# Altium PCB SimpleNode2.PcbDoc
Units mm, origin at the board's own origin, x right, y up, seen from the top; angles counter-clockwise.
Board outline 152.4 x 101.6 mm, 2 copper layers (Top Layer, Bottom Layer); 19 components, 14 nets, 59 pads, 6 vias.
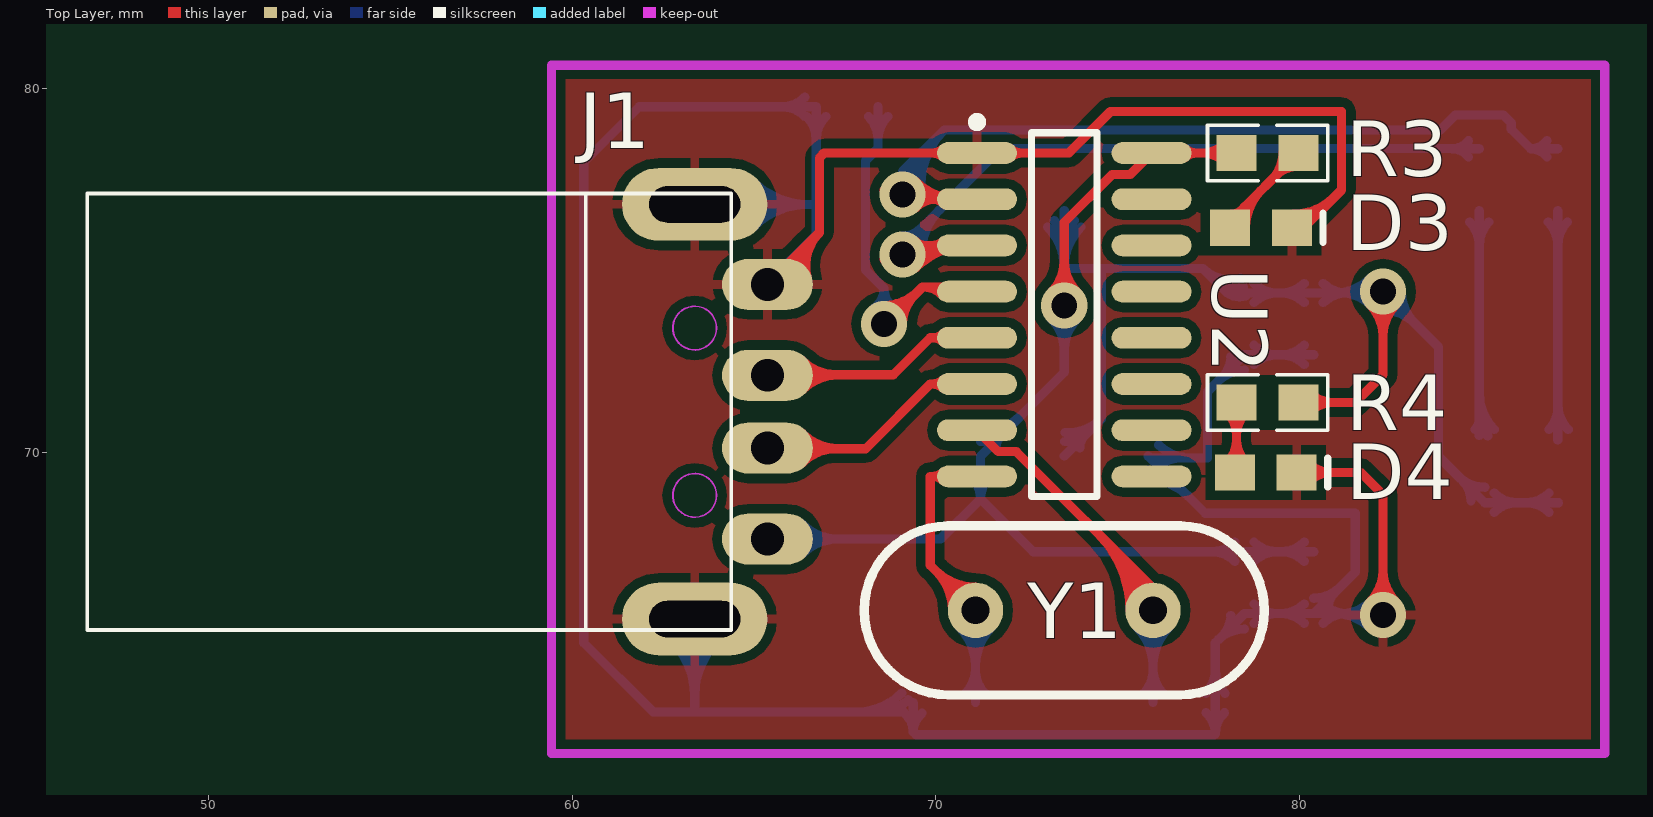
[diagram p0: Top Layer view]
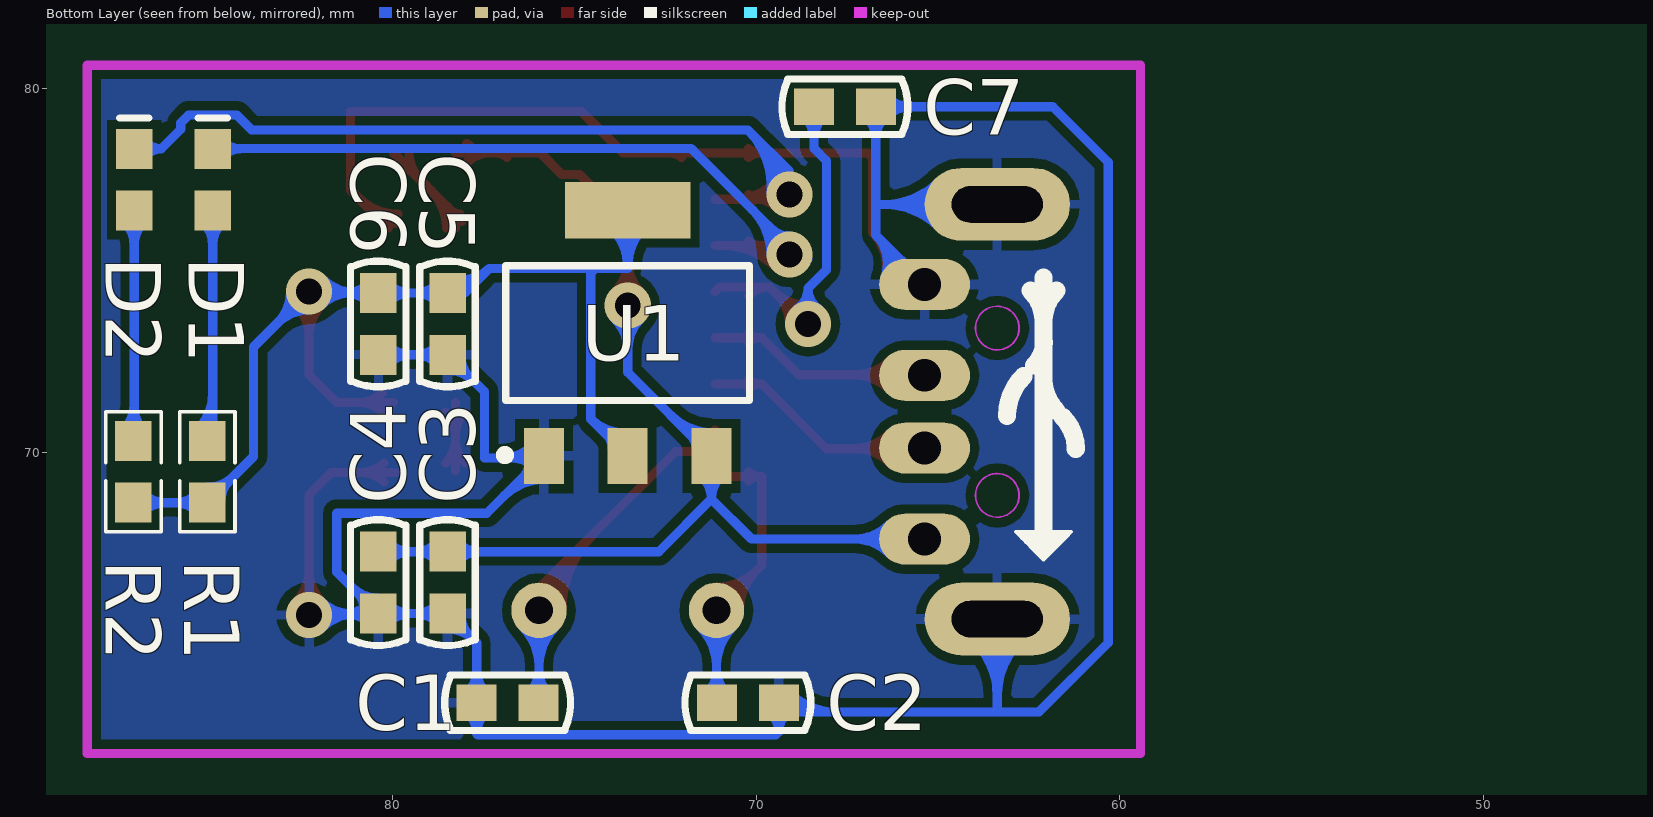
[diagram p1: Bottom Layer view, seen from below]

## Layer stack, top to bottom
Top Layer: signal copper 0.0356
Dielectric: dielectric 0.32, FR-4, Dk 4.8
Bottom Layer: signal copper 0.0356

## Board outline
25.4,25.4 177.8,25.4 177.8,127 25.4,127

## Design rules (kind name [scope] priority, off if disabled: settings)
Clearance [All] p1: gap=0.254
DiffPairsRouting DiffPair_DiffPairsRouting [InDifferentialPair ('RS232 Line Pair')] p1: maxlimit=0.254 minlimit=0.254 mostfreqgap=0.254 maxuncoupledlength=12.7
DiffPairsRouting DiffPair_DiffPairsRouting_1 [InDifferentialPair ('XTAL Line Pair')] p2: maxlimit=0.254 minlimit=0.254 mostfreqgap=0.254 maxuncoupledlength=12.7
DiffPairsRouting DiffPair_DiffPairsRouting_2 [All] p3: maxlimit=0.254 minlimit=0.254 mostfreqgap=0.254 maxuncoupledlength=12.7
DiffPairsRouting DiffPair_DiffPairsRouting_3 [InDifferentialPair ('XTAL Data Line Pair')] p4: maxlimit=0.254 minlimit=0.254 mostfreqgap=0.254 maxuncoupledlength=12.7
DiffPairsRouting DiffPair_DiffPairsRouting_4 [InDifferentialPair ('RS232 Data Line Pair')] p5: maxlimit=0.254 minlimit=0.254 mostfreqgap=0.254 maxuncoupledlength=12.7
DiffPairsRouting DiffPair_DiffPairsRouting_5 [InDifferentialPair ('USB Data Line Pair')] p6: maxlimit=0.254 minlimit=0.254 mostfreqgap=0.254 maxuncoupledlength=12.7
DiffPairsRouting DiffPair_DiffPairsRouting_6 [InDifferentialPair ('USB Data Line Pair')] p7: maxlimit=0.254 minlimit=0.254 mostfreqgap=0.254 maxuncoupledlength=12.7
DiffPairsRouting [All] p8: maxlimit=0.254 minlimit=0.254 mostfreqgap=0.254 maxuncoupledlength=12.7
MatchedLengths DiffPair_MatchedLengths [InDifferentialPair ('RS232 Line Pair')] p1: tolerance=25.4 checknetsindiffpair=TRUE checkdiffpairvsdiffpair=TRUE checkothers=TRUE
MatchedLengths DiffPair_MatchedLengths_1 [InDifferentialPair ('XTAL Line Pair')] p2: tolerance=25.4 checknetsindiffpair=TRUE checkdiffpairvsdiffpair=TRUE checkothers=TRUE
MatchedLengths DiffPair_MatchedLengths_2 [All] p3: tolerance=25.4 checknetsindiffpair=TRUE checkdiffpairvsdiffpair=TRUE checkothers=TRUE
MatchedLengths DiffPair_MatchedLengths_3 [InDifferentialPair ('XTAL Data Line Pair')] p4: tolerance=25.4 checknetsindiffpair=TRUE checkdiffpairvsdiffpair=TRUE checkothers=TRUE
MatchedLengths DiffPair_MatchedLengths_4 [InDifferentialPair ('RS232 Data Line Pair')] p5: tolerance=25.4 checknetsindiffpair=TRUE checkdiffpairvsdiffpair=TRUE checkothers=TRUE
MatchedLengths DiffPair_MatchedLengths_5 [InDifferentialPair ('USB Data Line Pair')] p6: tolerance=25.4 checknetsindiffpair=TRUE checkdiffpairvsdiffpair=TRUE checkothers=TRUE
MatchedLengths DiffPair_MatchedLengths_6 [InDifferentialPair ('USB Data Line Pair')] p7: tolerance=25.4 checknetsindiffpair=TRUE checkdiffpairvsdiffpair=TRUE checkothers=TRUE
PolygonConnect [All] p1: connectstyle=Relief reliefconductorwidth=0.254 reliefentries=4 polygonreliefangle="90 Angle"
RoutingVias [All] p1: holewidth=0.711 width=1.27 viastyle="Through Hole" minholewidth=0.711 minwidth=1.27 maxholewidth=0.711 maxwidth=1.27
SilkscreenOverComponentPads [All] p1 off: minsilkscreentomaskgap=0
SolderMaskExpansion [All] p1: expansion=0.102
Width DiffPair_Width [InDifferentialPair('RS232 Line Pair')] p1: maxlimit=0.254 minlimit=0.254 preferedwidth=0.254
Width DiffPair_Width_1 [InDifferentialPair('XTAL Line Pair')] p2: maxlimit=0.254 minlimit=0.254 preferedwidth=0.254
Width DiffPair_Width_2 [All] p3: maxlimit=0.254 minlimit=0.254 preferedwidth=0.254
Width DiffPair_Width_3 [InDifferentialPair('XTAL Data Line Pair')] p4: maxlimit=0.254 minlimit=0.254 preferedwidth=0.254
Width DiffPair_Width_4 [InDifferentialPair('RS232 Data Line Pair')] p5: maxlimit=0.254 minlimit=0.254 preferedwidth=0.254
Width DiffPair_Width_5 [InDifferentialPair('USB Data Line Pair')] p6: maxlimit=0.254 minlimit=0.254 preferedwidth=0.254
Width DiffPair_Width_6 [InDifferentialPair('USB Data Line Pair')] p7: maxlimit=0.254 minlimit=0.254 preferedwidth=0.254
Width [All] p8: maxlimit=0.254 minlimit=0.254 preferedwidth=0.254
26 further rules are at their usual default settings.

## Classes and differential pairs
differential pair "RS232 Line Pair": +TXD -RXD
differential pair "XTAL Line Pair": +XO -XI
differential pair "USB Data Line Pair": +UD+ -UD-

## Components (designator, comment, footprint, x,y, rotation, side; value= is the part's Value field where it differs from the comment)
C1 "CAP" C0603 76.835,63.119 r180 bottom
C2 "CAP" C0603 70.231,63.119 r0 bottom
C3 "104" C0603 78.486,66.421 r90 bottom
C4 "106" C0603 80.391,66.421 r90 bottom
C5 "104" C0603 78.486,73.533 r90 bottom
C6 "106" C0603 80.391,73.533 r90 bottom
C7 "104" C0603 67.564,79.502 r0 bottom
D1 "RXD" LED0603 84.963,77.672 r90 bottom
D2 "TXD" LED0603 87.122,77.672 r90 bottom
D3 "PWR5V" LED0603 79.121,76.2 r0 top
D4 "PWR3V3" LED0603 79.248,69.469 r0 top
J1 "USB-A" "USB-A 公头" 63.373,71.12 r0 top
R1 "470" R0603 85.09,69.469 r270 bottom
R2 "470" R0603 87.122,69.469 r270 bottom
R3 "470" R0603 79.121,78.232 r180 top
R4 "470" R0603 79.121,71.374 r0 top
U1 "ASM1117-3-3" SOT-223 73.533,73.279 r180 bottom
U2 "CH340G" SOP16 73.533,73.787 r0 top
Y1 "12M" HC-49S 73.533,65.659 r180 top

## Footprints (in the part's own frame and the unit in brackets; to place one, negate y for a bottom-side part, rotate by r counter-clockwise, add the part's x,y. Pads: shape width x height; smd on the part's side, far side on the other; paste and mask are expansions set on the pad)
C0603 [mm]
  rect 1.1x1 smd: 1(-0.85,0) 2(0.85,0)
  silkscreen extent -1.73,-0.76 1.73,0.76, body extent -1.14,-0.38 1.14,0.38, height 1
HC-49S [mil]
  round 60 hole 30: 1(-96.06,0) 2(96.06,0)
  silkscreen extent -217,-92 217,92
LED0603 [mm]
  rect 1.1x1 smd: 1(-1.025,-0.021) 2(0.675,-0.021)
  silkscreen extent 1.52,-0.42 1.52,0.38
R0603 [mm]
  rect 1.1x1 smd: 1(-0.85,0) 2(0.85,0)
  silkscreen extent -1.65,-0.76 1.65,0.76, body extent -1.14,-0.38 1.14,0.38, height 1
SOP16 [mm]
  oval 2.2x0.6 smd: 1(-2.4,4.445) 2(-2.4,3.175) 3(-2.4,1.905) 4(-2.4,0.635) 5(-2.4,-0.635) 6(-2.4,-1.905) 7(-2.4,-3.175) 8(-2.4,-4.445) 9(2.4,-4.445) 10(2.4,-3.175) 11(2.4,-1.905) 12(2.4,-0.635) 13(2.4,0.635) 14(2.4,1.905) 15(2.4,3.175) 16(2.4,4.445)
  silkscreen extent -2.52,-5 0.9,5.42, body extent -1.95,-4.95 1.95,4.95, height 1.5
SOT-223 [mm]
  rect 1.1x1.55 smd: 1(-2.3,-3.375) 2(0,-3.375) 3(2.3,-3.375)
  rect 3.45x1.55 smd: 4(0,3.375)
  silkscreen extent -3.5,-3.48 3.35,1.85, body extent -3.3,-3.94 3.3,3.43, height 0.8
"USB-A 公头" [mm]
  oval 1.5x1.4 on Bottom Overlay: 1(-1.27,3.683)
  oval 2.5x1.4 hole 0.9: 1(2,-3.5) 2(2,-1) 3(2,1) 4(2,3.5)
  oval 4x2 hole 1 slot 2.5 at 0 deg: 4(0,-5.7) 4(0,5.7)
  Keep-Out Layer circle w0.05: c0,-2.3 r0.6
  Keep-Out Layer circle w0.05: c0,2.3 r0.6
  silkscreen extent -16.7,-6 1,6

## Part data
D1 D2 D3 D4: library part 贴片发光二级管
J1: library part "USB-A 公头", "USB-A 公头"
Y1: library part 直插无源晶振

## Via types
v1: diameter 1.27, hole 0.711, Top Layer to Bottom Layer, 6 vias

## Nets (pads, with @x,y where several pads share a name; then routed paths per layer and width w, separated by ;. In a path a pad name is that pad's centre, name@x,y a point inside that pad or via, vN(x,y) a via of type N, cw(c..) or ccw(c..) an arc to the next point about the centre after c; other vN are vias at no path point)
GND: C1.1 C2.1 C3.1 C4.1 C5.1 C6.1 C7.1 D3.2 D4.2 J1.4 U1.1 U2.1 | length 153.8
  Top Layer w0.254: J1.4@65.373,74.62 66.802,76.049 ; J1.4@65.985,74.638 cw(c66.769,74.863) 66.193,75.44 ; J1.4@66.23,74.708 cw(c67.242,74.999) 66.497,75.744 ; J1.4@66.474,74.778 cw(c67.716,75.135) 66.802,76.049 ; U2.1@70.211,78.11 ccw(c69.915,77.814) 69.915,78.232 ccw(c69.915,78.65) U2.1@70.211,78.354 ; U2.1@72.055,78.11 cw(c72.351,77.814) 72.351,78.232 cw(c72.351,78.65) U2.1@72.055,78.354 ; D3.2@79.846,76.298 ccw(c79.846,77.238) 80.51,76.573 ; D3.2@79.846,76.552 ccw(c79.846,78.105) 80.944,77.007 ; D4.2 81.682,69.448 82.296,68.834 v1(82.296,65.532) ; D3.2@80.116,76.179 81.153,77.216 81.153,79.375 74.803,79.375 73.66,78.232 U2.1 66.929,78.232 66.802,78.105 66.802,76.049 ; D4.2@80.237,69.184 cw(c80.873,68.548) 80.873,69.448 cw(c80.873,70.349) D4.2@80.237,69.712 ; v1@81.937,65.891 ccw(c81.07,66.758) 82.296,66.758 ccw(c83.522,66.758) v1@82.655,65.891
  Bottom Layer w0.254: J1.4@62.756,64.803 cw(c61.265,63.312) 63.373,63.312 cw(c65.481,63.312) J1.4@63.99,64.803 ; J1.4@62.935,64.982 cw(c61.879,63.926) 63.373,63.926 cw(c64.867,63.926) J1.4@63.811,64.982 ; J1.4@63.373,65.42 63.373,62.865 ; J1.4@63.373,76.82 66.699,76.82 ; J1.4@64.811,76.382 cw(c65.867,75.326) 65.867,76.82 cw(c65.867,78.314) J1.4@64.811,77.258 ; J1.4@64.99,76.203 cw(c66.481,74.712) 66.481,76.82 cw(c66.481,78.928) J1.4@64.99,77.437 ; J1.4@65.361,74.632 66.714,75.985 ; J1.4@65.984,74.643 cw(c66.679,74.901) 66.155,75.426 ; J1.4@66.222,74.731 cw(c67.087,75.053) 66.434,75.705 ; C7.1@66.4,79.238 ccw(c65.764,78.602) 65.764,79.502 ccw(c65.764,80.402) C7.1@66.4,79.766 ; C7.1@66.45,79.238 cw(c65.814,78.602) 66.714,78.602 cw(c67.615,78.602) C7.1@66.978,79.238 ; J1.4@66.46,74.82 cw(c67.494,75.205) 66.714,75.985 ; 67.817,62.865 ccw(c67.817,64.633) C2.1@69.067,63.383 ; 68.431,62.865 ccw(c68.431,64.019) C2.1@69.247,63.203 ; C2.1@69.127,62.865 63.373,62.865 ; C2.1@69.141,62.834 cw(c68.708,62.318) 69.381,62.318 ; C2.1 69.381,62.318 ; C2.1@69.621,62.834 ccw(c70.055,62.318) 69.381,62.318 ; U1.1@75.833,69.256 cw(c75.833,67.692) 76.939,68.798 ; U1.1@75.833,69.51 cw(c75.833,68.559) 76.506,69.231 ; U1.1 U1.1@75.887,69.85 ; U1.1@76.132,69.605 cw(c76.724,69.013) 76.724,69.85 ; U1.1@76.132,70.203 ccw(c76.985,71.056) 76.985,69.85 ; U1.1@76.256,69.679 ccw(c76.734,69.679) 76.396,69.341 ; C1.1@77.421,63.383 ccw(c76.784,64.019) 77.685,64.019 ccw(c78.585,64.019) C1.1@77.949,63.383 ; C1.1@77.432,62.844 cw(c76.903,62.269) 77.685,62.269 ; 77.764,64.849 cw(c78.486,64.127) C3.1@78.486,65.148 ; 77.764,71.961 cw(c78.486,71.239) C5.1@78.486,72.26 ; 77.885,64.97 ccw(c77.333,65.521) C3.1@78.113,65.521 ; 77.885,72.082 ccw(c77.333,72.633) C5.1@78.113,72.633 ; C1.1@77.938,62.844 ccw(c78.467,62.269) 77.685,62.269 ; C3.1@78.75,65.307 cw(c79.386,64.671) 79.386,65.571 cw(c79.386,66.472) C3.1@78.75,65.835 ; C5.1@78.75,72.419 cw(c79.387,71.782) 79.387,72.683 cw(c79.386,73.583) C5.1@78.75,72.947 ; C4.1@80.127,65.307 ccw(c79.491,64.671) 79.491,65.571 ccw(c79.491,66.472) C4.1@80.127,65.835 ; C6.1@80.127,72.419 ccw(c79.491,71.783) 79.491,72.683 ccw(c79.491,73.584) C6.1@80.127,72.947 ; C4.1@80.391,65.994 ccw(c80.391,67.015) 81.113,66.293 ; C6.1 C5.1 77.47,71.667 77.47,69.85 U1.1@75.887,69.85 ; C4.1@80.655,65.307 cw(c81.291,64.671) 81.291,65.571 cw(c81.291,66.472) C4.1@80.655,65.835 ; C4.1@80.764,65.621 cw(c81.544,65.621) 80.992,66.172 ; 80.975,65.571 cw(c80.975,64.211) v1@81.937,65.173 ; 81.164,65.571 ccw(c81.164,66.664) v1@81.937,65.891 ; 81.589,65.571 cw(c81.589,64.825) v1@82.116,65.352 ; v1@82.257,65.571 C4.1 ; 63.373,62.865 62.23,62.865 60.325,64.77 60.325,77.978 61.849,79.502 C7.1 66.714,75.985 ; 69.381,62.318 69.461,62.238 77.654,62.238 77.685,62.269 ; U1.1@75.887,69.85 77.411,68.326 81.534,68.326 81.534,66.714 C4.1 ; 77.685,62.269 C1.1 77.685,64.77 C3.1 C4.1
NetC7_2: C7.2 U2.4 | length 15.2
  Top Layer w0.254: v1(68.58,73.533) 68.62,73.533 69.636,74.549 ; v1@68.58,73.787 ccw(c68.58,74.496) 69.082,73.995 ; v1@68.58,74.041 ccw(c68.58,75.364) 69.515,74.428 ; v1@69.088,73.533 cw(c70.218,73.533) 69.419,74.332 ; U2.4@70.207,74.303 ccw(c69.636,73.762) 69.636,74.549 ; U2.4 71.006,74.549 69.636,74.549
  Bottom Layer w0.254: C7.2@68.15,79.238 cw(c67.513,78.602) 68.414,78.602 cw(c69.314,78.602) C7.2@68.678,79.238 ; v1@68.289,73.949 ccw(c67.896,74.509) 68.58,74.509 ; C7.2 68.414,78.36 68.072,78.018 68.072,75.017 68.58,74.509 ; v1(68.58,73.533) 68.58,74.509 ; v1@68.871,73.949 cw(c69.264,74.509) 68.58,74.509
NetD1_1: D1.1 R1.1 | length 9.6
  Bottom Layer w0.254: D1.1@84.678,76.333 cw(c84.042,75.697) 84.942,75.697 cw(c85.843,75.697) D1.1@85.206,76.333 ; R1.1@84.826,70.633 ccw(c84.547,70.912) 84.942,70.912 ; R1.1@84.942,70.467 D1.1 ; 84.942,71.013 ccw(c85.734,71.013) R1.1@85.174,70.453 ; 84.942,71.626 ccw(c86.348,71.626) R1.1@85.354,70.633
NetD2_1: D2.1 R2.1 | length 9.1
  Bottom Layer w0.254: D2.1@86.837,76.333 cw(c86.201,75.697) 87.101,75.697 cw(c88.002,75.697) D2.1@87.365,76.333 ; R2.1@86.858,70.633 ccw(c86.272,71.219) 87.101,71.219 ; R2.1@87.101,70.34 D2.1 ; 87.101,71.32 ccw(c88.073,71.32) R2.1@87.386,70.633
NetD3_1: D3.1 R3.1 | length 6.1
  Top Layer w0.254: D3.1@78.096,76.357 R3.1 ; D3.1@78.146,76.552 ccw(c78.146,76.903) D3.1@78.394,76.655 ; D3.1@78.265,76.179 cw(c79.102,76.179) 78.51,76.771 ; D3.1@78.519,76.179 cw(c79.969,76.179) 78.944,77.205 ; 79.249,77.51 ccw(c78.527,78.232) R3.1@79.548,78.232 ; 79.37,77.631 cw(c79.921,77.079) R3.1@79.921,77.859
NetD4_1: D4.1 R4.1 | length 4.7
  Top Layer w0.254: R4.1@78.007,71.11 cw(c77.371,70.474) 78.271,70.474 cw(c79.172,70.474) R4.1@78.535,71.11 ; D4.1@78.009,69.712 ccw(c77.377,70.344) 78.271,70.344 ; D4.1@78.271,69.496 R4.1 ; 78.271,70.353 ccw(c79.178,70.353) D4.1@78.537,69.712
RXD: D1.2 U2.3 | length 29
  Top Layer w0.254: v1@68.58,75.311 v1@68.834,75.311 ; v1@69.268,75.258 cw(c70.314,74.212) U2.3@70.314,75.692 ; v1@69.447,75.079 cw(c70.928,73.598) U2.3@70.928,75.692 ; v1@69.447,75.797 ccw(c69.701,76.051) 69.701,75.692 ccw(c69.701,74.825) v1(69.088,75.438) v1@68.834,75.311 ; U2.3@70.211,75.57 ccw(c69.915,75.274) 69.915,75.692 ccw(c69.915,76.11) U2.3@70.211,75.814 ; U2.3 68.961,75.692 68.897,75.501 v1@68.834,75.311
  Bottom Layer w0.254: v1@68.58,75.311 68.834,75.311 v1(69.088,75.438) ; v1@68.981,75.545 71.795,78.359 84.189,78.359 84.201,78.347 ; v1@69.088,75.946 ccw(c69.088,76.655) 69.59,76.154 ; v1@69.342,75.438 cw(c70.472,75.438) 69.673,76.237 ; v1@69.596,75.438 cw(c71.339,75.438) 70.107,76.671 ; D1.2@84.643,78.125 ccw(c84.201,77.797) 84.201,78.347 ; D1.2@84.643,78.569 cw(c84.201,78.897) 84.201,78.347 ; D1.2 84.201,78.347
TXD: D2.2 U2.2 | length 32.3
  Top Layer w0.254: v1@68.58,77.216 v1@68.707,77.089 ; v1(69.088,77.089) v1@68.707,77.089 ; v1@69.268,77.269 ccw(c70.008,78.009) 70.008,76.962 ccw(c70.008,76.169) v1@69.447,76.73 ; v1@69.447,77.448 ccw(c70.621,78.622) U2.2@70.621,76.962 ; U2.2@70.211,76.84 ccw(c69.915,76.544) 69.915,76.962 ccw(c69.915,77.38) U2.2@70.211,77.084 ; U2.2 68.834,76.962 v1@68.707,77.089
  Bottom Layer w0.254: v1@69.341,77.11 cw(c71.07,77.253) 69.843,78.479 ; 69.456,78.092 ccw(c70.354,77.194) v1(69.088,77.089) 68.707,77.089 69.088,77.47 69.088,77.724 70.231,78.867 ; v1@69.594,77.131 cw(c71.786,77.312) 70.231,78.867 ; D2.2@86.802,78.125 ccw(c86.36,77.797) 86.36,78.347 ; D2.2@86.802,78.569 cw(c86.36,78.897) 86.36,78.347 ; D2.2 86.36,78.347 ; 70.231,78.867 83.873,78.867 84.284,79.278 85.6,79.278 85.823,79.055 85.823,78.884 86.36,78.347
UD+: J1.3 U2.5 | length 10.2
  Top Layer w0.254: J1.3@65.373,72.136 68.834,72.136 69.85,73.152 U2.5 ; J1.3@66.149,71.894 cw(c66.732,71.311) 66.732,72.136 ; J1.3@66.149,72.346 ccw(c66.655,72.852) 66.655,72.136 ; J1.3@66.328,71.715 cw(c67.345,70.698) 67.345,72.136 ; J1.3@66.328,72.525 ccw(c67.268,73.465) 67.268,72.136 ; U2.5@70.211,73.03 ccw(c69.915,72.734) 69.915,73.152 ccw(c69.915,73.57) U2.5@70.211,73.274
UD-: J1.2 U2.6 | length 10.5
  Top Layer w0.254: J1.2@65.373,70.104 68.072,70.104 69.85,71.882 U2.6 ; J1.2@66.149,69.894 cw(c66.655,69.388) 66.655,70.104 ; J1.2@66.149,70.346 ccw(c66.732,70.929) 66.732,70.104 ; J1.2@66.328,69.715 cw(c67.268,68.775) 67.268,70.104 ; J1.2@66.328,70.525 ccw(c67.345,71.542) 67.345,70.104 ; U2.6@70.211,71.76 ccw(c69.915,71.464) 69.915,71.882 ccw(c69.915,72.3) U2.6@70.211,72.004
VCC3V3: C5.2 C6.2 R1.2 R2.2 R4.2 U1.2 U1.4 | length 54.6
  Top Layer w0.254: R4.2 81.534,71.374 82.296,72.136 v1(82.296,74.422) ; R4.2@80.285,71.11 cw(c80.921,70.474) 80.921,71.374 cw(c80.921,72.274) R4.2@80.285,71.638 ; v1@81.937,74.063 cw(c81.07,73.196) 82.296,73.196 cw(c83.522,73.196) v1@82.655,74.063
  Bottom Layer w0.254: U1.4@73.075,76.196 cw(c71.969,75.09) 73.533,75.09 cw(c75.097,75.09) U1.4@73.991,76.196 ; U1.4@73.254,76.375 cw(c72.582,75.703) 73.533,75.703 cw(c74.484,75.703) U1.4@73.812,76.375 ; U1.2 74.549,70.92 74.549,74.93 74.422,75.057 ; U1.4 73.533,75.057 74.422,75.057 ; U1.2@73.545,70.298 ccw(c73.599,71.081) 74.155,70.526 ; U1.2@73.562,70.551 ccw(c73.651,71.818) 74.549,70.92 ; U1.2@73.956,70.129 cw(c74.434,70.129) 74.096,70.467 ; 77.646,74.754 ccw(c78.224,75.331) C5.2@78.453,74.547 ; 77.95,74.45 ccw(c78.361,74.862) C5.2@78.524,74.303 ; C5.2@78.017,74.383 77.343,75.057 ; C5.2@78.381,74.791 cw(c78.087,75.801) 77.343,75.057 ; C5.2 C6.2 v1@82.257,74.383 ; C5.2@78.75,74.119 cw(c79.387,73.482) 79.387,74.383 cw(c79.386,75.283) C5.2@78.75,74.647 ; C6.2@80.127,74.119 ccw(c79.491,73.482) 79.491,74.383 ccw(c79.491,75.283) C6.2@80.127,74.647 ; C6.2@80.655,74.119 cw(c81.291,73.482) 81.291,74.383 cw(c81.291,75.283) C6.2@80.655,74.647 ; 80.975,74.383 ccw(c80.975,75.743) v1@81.937,74.781 ; 81.164,74.383 cw(c81.164,73.29) v1@81.937,74.063 ; 81.589,74.383 ccw(c81.589,75.129) v1@82.116,74.602 ; v1@82.296,73.914 cw(c82.296,72.688) 83.163,73.555 cw(c84.03,74.422) v1@82.804,74.422 ; v1(82.296,74.422) 83.82,72.898 83.82,69.889 R1.2 R2.2 ; 84.368,69.341 ccw(c85.09,70.063) R1.2@85.09,69.042 ; 84.489,69.22 cw(c83.937,68.669) R1.2@84.717,68.669 ; R1.2@85.354,68.355 cw(c85.99,67.719) 85.99,68.619 cw(c85.99,69.52) R1.2@85.354,68.883 ; R2.2@86.858,68.355 ccw(c86.222,67.719) 86.222,68.619 ccw(c86.222,69.52) R2.2@86.858,68.883 ; 74.422,75.057 77.343,75.057
VCC5V: C3.2 C4.2 J1.1@65.373,67.62 R3.2 U1.3 U2.16 | length 47.5
  Top Layer w0.254: v1@73.174,74.4 ccw(c72.307,75.267) 73.533,75.267 ccw(c74.759,75.267) v1@73.892,74.4 ; v1(73.533,74.041) 73.533,76.325 74.851,77.643 75.344,77.643 U2.16 R3.2 ; U2.16@76.855,78.11 cw(c77.151,77.814) 77.151,78.232 cw(c77.151,78.65) U2.16@76.855,78.354 ; R3.2@77.957,77.968 ccw(c77.321,77.332) 77.321,78.232 ccw(c77.321,79.132) R3.2@77.957,78.496
  Bottom Layer w0.254: J1.1@65.373,67.62 70.132,67.62 71.233,68.721 ; J1.1@66.149,67.394 cw(c66.693,66.85) 66.693,67.62 cw(c66.693,68.39) J1.1@66.149,67.846 ; J1.1@66.328,67.215 cw(c67.306,66.237) 67.306,67.62 cw(c67.306,69.003) J1.1@66.328,68.025 ; U1.3@70.948,69.366 cw(c70.36,68.721) 71.233,68.721 ; U1.3@71.233,70.298 ccw(c71.233,71.249) 71.906,70.577 ; U1.3@71.233,70.552 ccw(c71.233,72.116) 72.339,71.01 ; U1.3@71.518,69.366 ccw(c72.106,68.721) 71.233,68.721 ; U1.3@71.656,70.129 cw(c72.134,70.129) 71.796,70.467 ; v1@73.174,73.682 cw(c72.307,72.815) 73.533,72.815 cw(c74.759,72.815) v1@73.892,73.682 ; v1(73.533,74.041) 73.533,72.204 U1.3 71.233,68.721 ; C3.2@78.222,67.007 ccw(c77.586,66.37) 77.586,67.271 ccw(c77.586,68.171) C3.2@78.222,67.535 ; C3.2@78.75,67.007 cw(c79.386,66.37) 79.386,67.271 cw(c79.386,68.171) C3.2@78.75,67.535 ; C4.2@80.127,67.007 ccw(c79.491,66.37) 79.491,67.271 ccw(c79.491,68.171) C4.2@80.127,67.535 ; C4.2 C3.2 72.683,67.271 71.233,68.721
XI: C1.2 U2.7 Y1.1 | length 21.6
  Top Layer w0.254: U2.7 71.722,70.023 72.215,70.023 75.973,66.265 Y1.1 ; 74.46,67.778 cw(c72.342,65.659) Y1.1@75.338,65.659 ; 74.894,67.344 cw(c73.209,65.659) Y1.1@75.592,65.659 ; 75.328,66.91 cw(c74.076,65.659) Y1.1@75.846,65.659 ; 75.761,66.477 cw(c74.943,65.659) Y1.1@76.1,65.659
  Bottom Layer w0.254: Y1.1@75.524,65.21 cw(c74.44,64.126) 75.973,64.126 cw(c77.506,64.126) Y1.1@76.422,65.21 ; Y1.1@75.704,65.39 cw(c75.053,64.739) 75.973,64.739 cw(c76.893,64.739) Y1.1@76.242,65.39 ; C1.2@75.721,63.383 ccw(c75.113,63.991) 75.973,63.991 ; C1.2@75.973,63.131 Y1.1 ; 75.973,64.048 ccw(c76.914,64.048) C1.2@76.249,63.383
XO: C2.2 U2.8 Y1.2 | length 17.8
  Top Layer w0.254: U2.8@70.211,69.22 ccw(c69.915,68.924) 69.915,69.342 ccw(c69.915,69.76) U2.8@70.211,69.464 ; Y1.2@70.458,65.659 ccw(c68.925,65.659) 70.009,66.743 ccw(c71.093,67.827) Y1.2@71.093,66.294 ; Y1.2@70.712,65.659 ccw(c69.792,65.659) 70.443,66.309 ccw(c71.093,66.96) Y1.2@71.093,66.04 ; Y1.2 69.85,66.902 69.85,69.342 U2.8
  Bottom Layer w0.254: Y1.2@70.644,65.21 cw(c69.56,64.126) 71.093,64.126 cw(c72.626,64.126) Y1.2@71.542,65.21 ; C2.2@70.817,63.383 ccw(c70.151,64.049) 71.093,64.049 ; Y1.2@70.824,65.39 cw(c70.173,64.739) 71.093,64.739 cw(c72.013,64.739) Y1.2@71.362,65.39 ; C2.2@71.093,63.131 Y1.2 ; 71.093,63.99 ccw(c71.952,63.99) C2.2@71.345,63.383
pads on no net: J1.1@62.103,74.803 U2.9 U2.10 U2.11 U2.12 U2.13 U2.14 U2.15

## Polygon pours and split planes (outlines as drawn)
GND on Top Layer "Top Layer-No Net" (solid, remove dead copper, pour order 2): 88.392,80.645 59.436,80.645 59.436,61.722 88.392,61.722
GND on Bottom Layer "Bottom Layer-No Net" (solid, remove dead copper, pour order 4): 59.436,80.645 59.436,61.722 88.392,61.722 88.392,80.645

## Keep-outs
Keep-Out Layer:
  lines w0.254: 59.436,61.722 88.392,61.722 88.392,80.645 59.436,80.645 59.436,61.722

## Silkscreen, mask and mechanical layers (free items; w line width, h text height)
Mechanical 1:
  lines w0.254: 59.436,61.722 88.392,61.722 88.392,80.645 59.436,80.645